# EAGLE board StationModule (EAGLE 7.2.0)
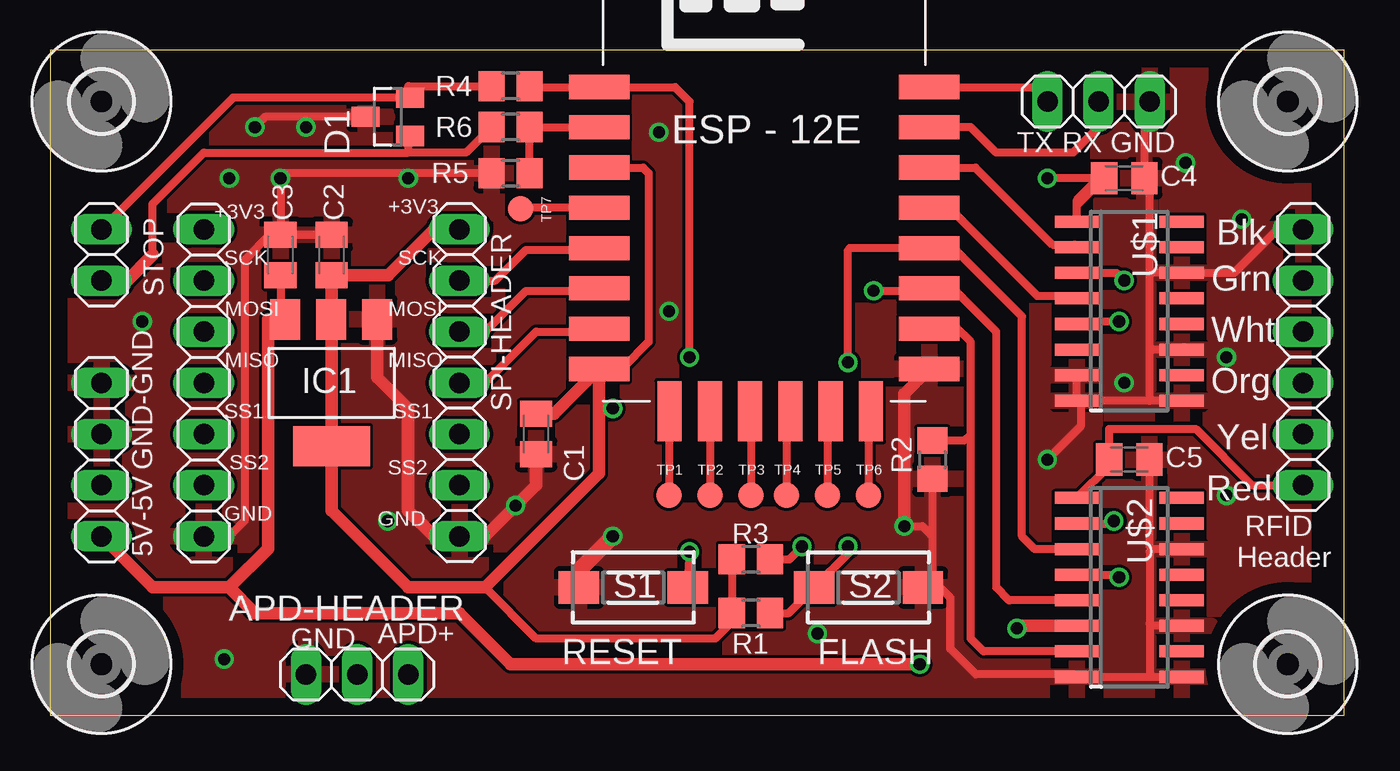
[diagram p0: board, top side]
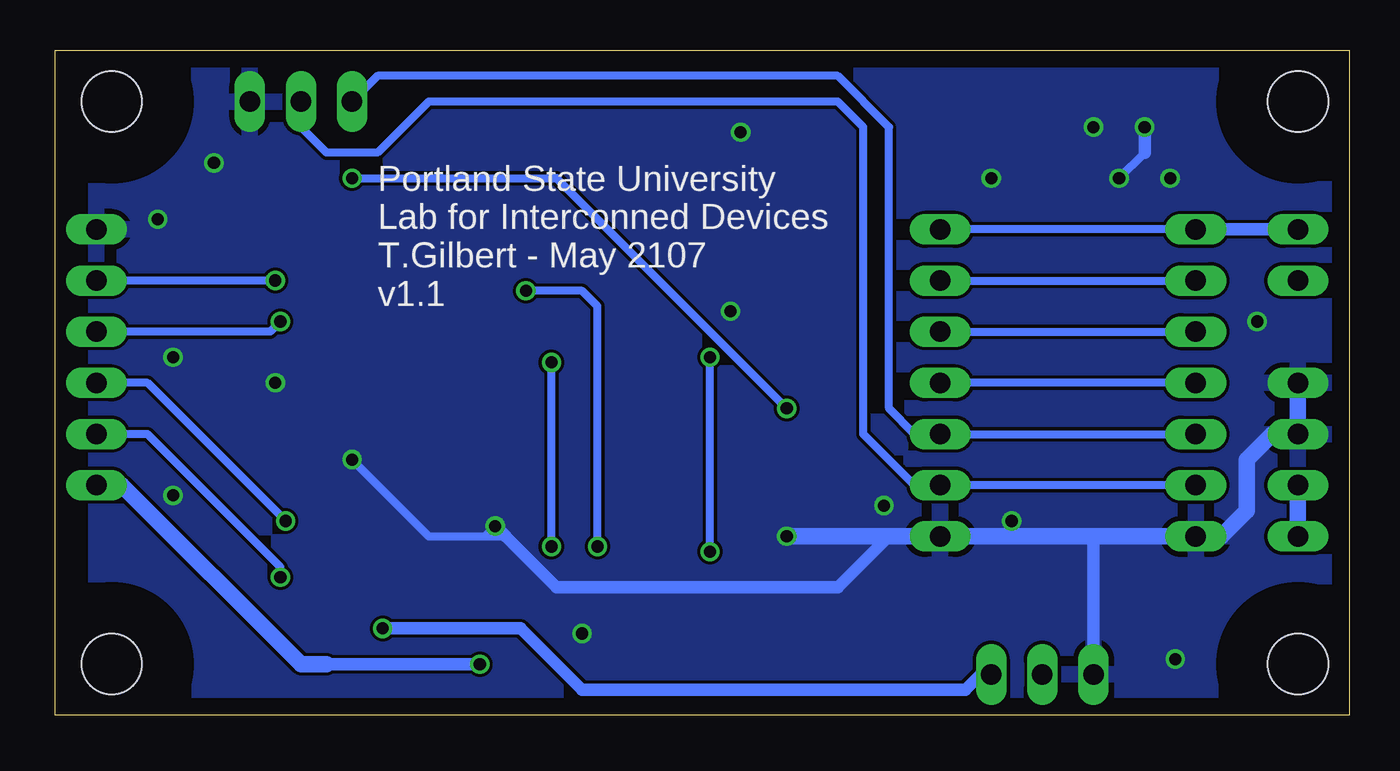
[diagram p1: board, bottom side, seen from below]

Size 64.26 x 33.02 mm. Coordinates in mm from the lower left corner, seen from the top.
Outline: 0,0 64.26,0 64.26,33.02 0,33.02 0,0
Copper layers (1*16): Top 0.0356mm / dielectric 1.5011mm / Bottom 0.0356mm
Design rules "OSHParkDRC": minimum track width 6mil, minimum drill 13mil, track to track 6mil, track to pad 6mil, pad to pad 6mil, via to via 6mil, smd to smd 6mil, copper to edge 15mil, drill to drill 6mil, minimum pad ring 7mil, minimum via ring 7mil, stop-mask expansion 3mil, vias tented up to drill 0mil, thermal gap 10mil

## Footprints (pad centres in the part's own frame; a part is rotated, then mirrored left to right if it is on the bottom)
C0805K = smd 1.3 x 1.6: 1 -1,0; 2 1,0
SOT23 = smd 1 x 1.4: 1 -0.95,-1.1; 2 0.95,-1.1; 3 0,1.1
3,0 = hole 3: 0,0
SOT223 = smd 1.499 x 2.007: 1 -2.261,-3.15; 2 0.025,-3.15; 3 2.311,-3.15 | smd 3.81 x 2.007: 4 0,3.15
1X03 = drill 1.016 long: 1 -2.54,0; 2 0,0; 3 2.54,0
1X07 = drill 1.016 long: 1 -7.62,0; 2 -5.08,0; 3 -2.54,0; 4 0,0; 5 2.54,0; 6 5.08,0; 7 7.62,0
R0805 = smd 1.3 x 1.5: 1 -0.95,0; 2 0.95,0
1X06 = drill 1.016 long: 1 -6.35,0; 2 -3.81,0; 3 -1.27,0; 4 1.27,0; 5 3.81,0; 6 6.35,0
DTSM-3 = smd 2 x 1.6: 1 -2.7,0; 2 2.7,0
1X02 = drill 1.016 long: 1 -1.27,0; 2 1.27,0
B1,27 = smd 1.27 x 1.27: TP 0,0
ESP12E-SMD = smd 3 x 1.2: ADC -8.3,3.8; CH_PD -8.3,1.8; GND 8.1,-8.2; GPIO0 8.1,-2.2; GPIO2 8.1,-4.2; GPIO4 8.1,-0.2; GPIO5 8.1,1.8; GPIO12 -8.3,-4.2; GPIO13 -8.3,-6.2; GPIO14 -8.3,-2.2; GPIO15 8.1,-6.2; GPIO16 -8.3,-0.2; RESET -8.3,5.8; RXD0 8.1,3.8; TXD0 8.1,5.8; VCC -8.3,-8.2 | smd 1.2 x 3: CS0 -4.8,-10.3; GPIO9 -0.8,-10.3; GPIO10 1.2,-10.3; MISO -2.8,-10.3; MOSI 3.2,-10.3; SCLK 5.2,-10.3
SOIC16N = smd 0.6 x 2.2: 1 -4.445,-2.6; 2 -3.175,-2.6; 3 -1.905,-2.6; 4 -0.635,-2.6; 5 0.635,-2.6; 6 1.905,-2.6; 7 3.175,-2.6; 8 4.445,-2.6; 9 4.445,2.6; 10 3.175,2.6; 11 1.905,2.6; 12 0.635,2.6; 13 -0.635,2.6; 14 -1.905,2.6; 15 -3.175,2.6; 16 -4.445,2.6
1X04 = drill 1.016 long: 1 -3.81,0; 2 -1.27,0; 3 1.27,0; 4 3.81,0

## Placement (x,y rotation side)
C1  100n  [C0805K]  24.13,13.97 270 top
C2  100u  [C0805K]  13.97,22.86 270 top
C3  10u  [C0805K]  11.43,22.86 270 top
C4  100n  [C0805K]  53.34,26.67 0 top
C5  100n  [C0805K]  53.59,12.7 0 top
D1  MMBZ5V6ALT1G  [SOT23]  16.76,29.72 90 top
H1  MOUNT-HOLE3.0  [3,0]  61.47,2.54 0 top
H2  MOUNT-HOLE3.0  [3,0]  61.47,30.48 0 top
H3  MOUNT-HOLE3.0  [3,0]  2.54,2.54 0 top
H4  MOUNT-HOLE3.0  [3,0]  2.54,30.48 0 top
IC1  REG1117  [SOT223]  13.97,16.51 180 top
JP1  [1X03]  52.07,30.48 0 top
JP3  APD-HEADER  [1X03]  15.24,2.03 180 top
JP4  [1X07]  7.62,16.51 90 top
R1  10k  [R0805]  34.8,5.08 180 top
R2  10k  [R0805]  43.81,12.7 270 top
R3  10k  [R0805]  34.8,7.75 180 top
R4  10k  [R0805]  22.86,31.24 180 top
R5  10k  [R0805]  22.86,26.92 0 top
R6  33k  [R0805]  22.86,29.21 180 top
RFID-HEADER  RFID-HEADER  [1X06]  62.23,17.78 270 top
S1  RESET  [DTSM-3]  28.96,6.35 0 top
S2  BOOT-LOADER  [DTSM-3]  40.64,6.35 0 top
SPI-HEADER  [1X07]  20.32,16.51 270 top
STOP  [1X02]  2.54,22.86 270 top
TP1  TPB1,27  [B1,27]  30.73,10.92 0 top
TP2  TPB1,27  [B1,27]  32.77,10.92 0 top
TP3  TPB1,27  [B1,27]  34.8,10.92 0 top
TP4  TPB1,27  [B1,27]  36.58,10.92 0 top
TP5  TPB1,27  [B1,27]  38.61,10.92 0 top
TP6  TPB1,27  [B1,27]  40.64,10.92 0 top
TP7  TPB1,27  [B1,27]  23.37,25.15 0 top
U1  [ESP12E-SMD]  35.56,25.4 0 top
U$1  4050B  [SOIC16N]  53.59,20.07 270 top
U$2  4050B  [SOIC16N]  53.59,6.35 270 top
USB  5V-Power  [1X04]  2.54,12.7 90 top

## Library data of the parts
C1-C5 R1-R6 = rcl
D1 = diode
H1-H4 = holes
IC1 = burr-brown; MPN: REG1117; OC_FARNELL: 1097566; OC_NEWARK: 14P6981
JP1 JP4 RFID-HEADER SPI-HEADER STOP USB = pinhead+
JP3 = pinhead
S1 S2 = switch-tact
TP1-TP7 = testpad
U1 = esp8266modules
U$1 U$2 = Ty2017

## Nets
+3V3: C1.1 C2.2 C4.1 D1.2 IC1.2 IC1.4 JP4.7 R1.2 R3.2 R4.2 SPI-HEADER.1 STOP.1 U1.CH_PD U1.VCC U$1.1
+5V: C3.2 C5.1 IC1.3 RFID-HEADER.6 U$2.1 USB.1 USB.2
ADC: R5.2 R6.1 U1.ADC
APD_EN: JP3.1 U$2.6
BUZZER: RFID-HEADER.5 U$2.4
GND: C1.2 C2.1 C3.1 C4.2 C5.2 D1.3 IC1.1 JP1.3 JP3.3 JP4.1 R2.2 R5.1 RFID-HEADER.1 S1.1 S2.2 SPI-HEADER.7 U1.GND U$1.7 U$1.8 U$1.9 U$1.11 U$1.14 U$2.8 U$2.9 U$2.11 U$2.14 USB.3 USB.4
GPIO0: R1.1 S2.1 U1.GPIO0 U$2.3
GPIO1: JP1.1 JP4.3 SPI-HEADER.5 U1.TXD0
GPIO2: R3.1 U1.GPIO2 U$2.5
GPIO3: JP1.2 JP4.2 SPI-HEADER.6 U1.RXD0
GPIO4: U1.GPIO4 U$1.4
GPIO5: U1.GPIO5 U$1.2
GPIO12: JP4.5 SPI-HEADER.3 U1.GPIO12
GPIO13: JP4.4 SPI-HEADER.4 U1.GPIO13
GPIO14: JP4.6 SPI-HEADER.2 U1.GPIO14
GPIO15: R2.1 U1.GPIO15 U$2.7
GREEN_LED: RFID-HEADER.4 U$2.2
N$1: U$2.10
N$2: U$2.12
N$3: U$2.15
N$4: U$1.6
N$5: U$1.10
N$6: U$1.12
N$7: U$1.15
N$8: TP7.TP U1.GPIO16
N$9: TP1.TP U1.CS0
N$10: TP2.TP U1.MISO
N$11: TP3.TP U1.GPIO9
N$12: TP4.TP U1.GPIO10
N$13: TP5.TP U1.MOSI
N$15: TP6.TP U1.SCLK
RESET: R4.1 S1.2 U1.RESET
RFID-DATA0: RFID-HEADER.2 U$1.3
RFID-DATA1: RFID-HEADER.3 U$1.5
STOP: D1.1 R6.2 STOP.2

## Tracks (layer width: path | path; a pad name or v marks a point on that pad's centre or on a via)
+3V3  (via drill 0.6)
  Top 0.406: U$1.1 50.99,25.32 | 50.99,25.32 C4.1 | R4.2 17.78,31.24 17.78,30.75 D1.2 9.08,30.67 STOP.1 | U1.CH_PD 29.44,27.2 29.72,26.92 29.72,18.54 28.45,17.27 27.33,17.27 U1.VCC | R1.2 R3.2 33.85,4.64 33.02,3.81 24.13,3.81 21.59,6.35 | 50.99,25.32 50.99,25.59 52.07,26.67 v49.53,26.67 | v27.94,15.24 27.26,15.24
  Top 0.61: 13.97,19.68 13.97,10.16 17.78,6.35 21.59,6.35 27.26,12.02 27.26,15.24 U1.VCC 25.03,14.97 C1.1 | 13.97,19.68 C2.2 16.78,21.86 19.05,24.13 SPI-HEADER.1 | 13.97,19.68 IC1.2
  Bottom 0.406: JP4.7 SPI-HEADER.1 | v49.53,26.67 39.37,26.67 v27.94,15.24
  Bottom 0.61: STOP.1 JP4.7
+5V  (via drill 0.6)
  Top 0.406: U$2.1 52.59,12.4 C5.1 52.59,14.22 56.9,14.22 59.69,11.43 RFID-HEADER.6 | C3.2 11.43,19.89 IC1.3
  Top 0.61: IC1.3 10.82,19.66 10.82,8.28 8.89,6.35 | 8.89,6.35 5.08,6.35 USB.1 | v43.18,2.54 22.86,2.54 20.32,5.08 10.16,5.08 8.89,6.35
  Bottom 0.61: v43.18,2.54 50.8,2.54
  Bottom 0.813: USB.1 USB.2 | 50.8,2.54 52.07,2.54 60.96,11.43 RFID-HEADER.6
ADC
  Top 0.406: U1.ADC R6.1 R5.2
APD_EN  (via drill 0.6)
  Top 0.61: U$2.6 48.13,4.45 v48.01,4.32
  Bottom 0.61: JP3.1 18.29,2.03 19.05,1.27 38.1,1.27 41.15,4.32 v48.01,4.32
BUZZER  (via drill 0.6)
  Top 0.406: U$2.4 52.96,6.98 v53.09,6.86
  Bottom 0.406: v53.09,6.86 53.09,7.37 59.69,13.97 RFID-HEADER.5
GND  (via drill 0.6)
  Top 0.406: 56.32,18.29 U$1.11 54.61,18.16 | U$1.7 U$1.8 51.18,15.62 | 54.61,1.91 U$2.8 50.87,2.03 45.97,2.03 44.7,3.3 44.7,5.84 44.2,6.35 S2.2 43.81,6.83 43.81,8.89 | 54.61,1.91 U$2.9 | 55.24,4.45 U$2.11 54.74,4.45 54.61,4.57 | U$2.14 54.74,8.26 | 54.74,8.26 54.61,8.13 54.61,4.57 | 54.61,4.57 54.61,1.91 | C5.2 54.59,8.4 54.74,8.26 | U$1.9 54.61,15.62 | 54.61,15.62 54.61,18.16 | 54.61,18.16 54.61,21.97 | 54.61,21.97 54.61,26.67 C4.2 54.34,30.21 JP1.3 | 54.61,21.97 U$1.14 58.8,21.97 60.96,24.13 RFID-HEADER.1 | R2.2 43.81,8.89 | v42.42,9.4 43.31,9.4 43.81,8.89 | D1.3 10.67,29.72 v10.16,29.21 | R5.1 11.68,26.92 v11.43,26.67 C3.1 C2.1 10.91,23.86 9.65,22.61 9.65,9.65 8.89,8.89 JP4.1 | 54.61,15.62 51.18,15.62 | 51.18,15.62 51.18,14.35 v49.53,12.7
  Top 0.61: v42.42,9.4 42.42,15.96 U1.GND | 15.9,19.66 IC1.1 16.23,16.79 17.78,15.24 17.78,10.16 19.05,8.89 SPI-HEADER.7 21.59,8.89 24.13,11.43 C1.2
  Top 0.813: S1.1 26.26,7.21 v27.94,8.89
  Bottom 0.406: v11.43,26.67 10.16,27.94 | 42.93,8.89 v42.42,9.4 | v49.53,12.7 45.72,8.89 41.91,8.89
  Bottom 0.61: JP4.1 6.35,8.89 | SPI-HEADER.7 22.86,8.89 25.4,6.35 39.37,6.35 41.91,8.89 v42.42,9.4 | v10.16,29.21 10.16,27.94 | JP3.3 12.7,8.89
  Bottom 0.813: JP4.1 12.7,8.89 SPI-HEADER.7 v27.94,8.89 | USB.4 USB.3 3.81,13.97 5.08,12.7 5.08,10.16 6.35,8.89
  other vias: 12.7,29.21 8.89,26.67 17.78,26.67 30.23,28.96 30.73,20.07 23.11,10.41 56.39,27.43 59.18,24.64 58.42,17.78 53.34,16.51 58.42,10.92 38.1,4.06 16.76,9.65 4.57,19.56 8.64,2.79
  pour Top: 1.27,31.75 1.27,1.27 62.23,1.27 62.23,31.75
  pour Bottom: 1.27,31.75 62.23,31.75 62.23,1.27 1.27,1.27
GPIO0  (via drill 0.6)
  Top 0.406: U$2.3 48.9,8.26 48.26,8.89 48.26,19.81 44.96,23.11 43.75,23.11 U1.GPIO0 39.71,23.2 39.62,23.11 v39.62,17.53 | v39.62,8.38 39.62,8.03 S2.1 36.67,5.08 R1.1
  Bottom 0.406: v39.62,8.38 v39.62,17.53
GPIO1
  Top 0.406: U1.TXD0 48.81,31.2 JP1.1
  Bottom 0.406: JP4.3 SPI-HEADER.5 21.59,13.97 22.86,15.24 22.86,29.21 25.4,31.75 48.26,31.75 JP1.1
GPIO2  (via drill 0.6)
  Top 0.406: U$2.5 47.62,5.72 46.99,6.35 46.99,19.05 44.45,21.59 44.05,21.59 U1.GPIO2 43.54,21.08 v40.89,21.08 | R3.1 36.7,7.75 v37.34,8.38
  Bottom 0.406: v37.34,8.38 37.34,20.32 38.1,21.08 v40.89,21.08
GPIO3
  Top 0.406: JP1.2 52.07,29.21 50.8,27.94 46.99,27.94 45.72,29.21 U1.RXD0
  Bottom 0.406: JP4.2 SPI-HEADER.6 21.59,11.43 24.13,13.97 24.13,29.21 25.4,30.48 45.72,30.48 48.26,27.94 50.8,27.94 52.07,29.21 JP1.2
GPIO4
  Top 0.406: U1.GPIO4 44.65,25.2 49.02,20.83 50.87,20.83 U$1.4
GPIO5
  Top 0.406: U1.GPIO5 45.95,27.2 49.78,23.37 50.87,23.37 U$1.2
GPIO12
  Top 0.406: SPI-HEADER.3 21.59,19.05 23.62,21.08 27.14,21.08 U1.GPIO12
  Bottom 0.406: SPI-HEADER.3 JP4.5
GPIO13
  Top 0.406: U1.GPIO13 27.11,19.05 24.13,19.05 21.59,16.51 SPI-HEADER.4
  Bottom 0.406: JP4.4 SPI-HEADER.4
GPIO14
  Top 0.406: SPI-HEADER.2 22.1,21.59 23.62,23.11 27.17,23.11 U1.GPIO14
  Bottom 0.406: SPI-HEADER.2 JP4.6
GPIO15
  Top 0.406: U$2.7 46.35,3.18 45.72,3.81 45.72,13.97 | 45.72,13.97 45.72,18.54 44.96,19.3 43.76,19.3 U1.GPIO15 | R2.1 45.4,13.65 45.72,13.97
GREEN_LED  (via drill 0.6)
  Top 0.406: U$2.2 52.7,9.52 v52.83,9.65
  Bottom 0.406: v52.83,9.65 59.69,16.51 RFID-HEADER.4
N$8
  Top 0.406: U1.GPIO16 23.37,25.2 TP7.TP
N$9
  Top 0.406: U1.CS0 30.73,15.1 TP1.TP
N$10
  Top 0.406: U1.MISO TP2.TP
N$11
  Top 0.406: U1.GPIO9 34.8,15.1 TP3.TP
N$12
  Top 0.406: U1.GPIO10 36.58,15.1 TP4.TP
N$13
  Top 0.406: U1.MOSI 38.61,15.1 TP5.TP
N$15
  Top 0.406: U1.SCLK 40.64,15.1 TP6.TP
RESET  (via drill 0.6)
  Top 0.406: R4.1 23.85,31.2 U1.RESET 31.03,31.2 31.75,30.48 v31.75,17.78 | S1.2 31.75,7.78 v31.75,8.13
  Bottom 0.406: v31.75,8.13 v31.75,17.78
RFID-DATA0  (via drill 0.6)
  Top 0.406: U$1.3 52.96,21.97 v53.34,21.59
  Bottom 0.406: v53.34,21.59 RFID-HEADER.2
RFID-DATA1  (via drill 0.6)
  Top 0.406: U$1.5 51.12,19.56 v53.09,19.56
  Bottom 0.406: v53.09,19.56 53.59,19.05 RFID-HEADER.3
STOP
  Top 0.406: R6.2 20.64,27.94 17.78,27.94 | D1.1 17.78,28.68 17.78,27.94 | 17.78,27.94 7.62,27.94 5.08,25.4 5.08,22.86
  Top 0.61: STOP.2 3.81,21.59 5.08,22.86

## Text on the board
tPlace: TX RX GND | GND-GND | 5V-5V | GND | APD+ | RESET | FLASH
bPlace: Portland State University / Lab for Interconned Devices / T.Gilbert - May 2107 / v1.1
tNames: +3V3 | +3V3 | Blk | SCK | SCK | Grn | MOSI | MOSI | Wht | MISO | MISO | Org | SS1 | SS1 | Yel | SS2 | SS2 | Red | GND | GND | RFID / Header